# EAGLE board schematic (EAGLE 8.2.1)
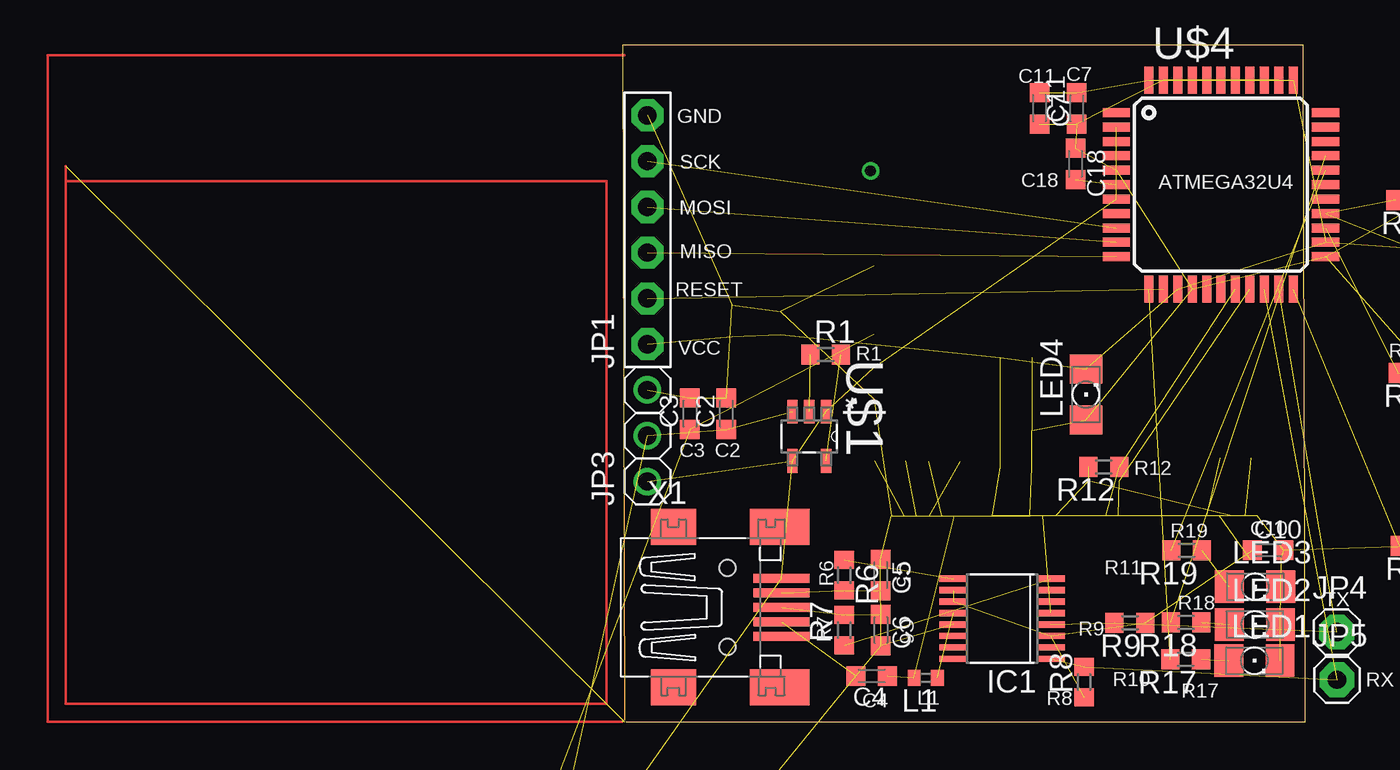
[diagram p0: board, top side]
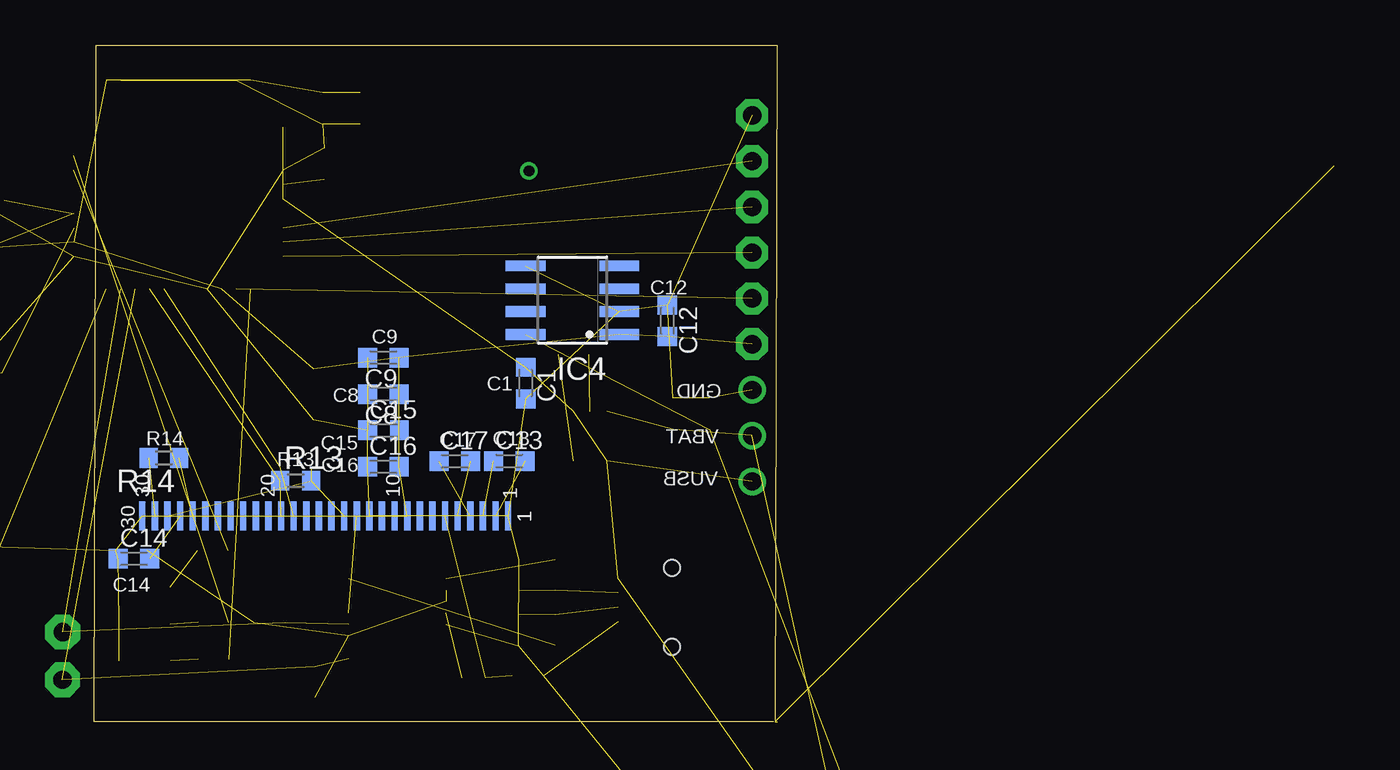
[diagram p1: board, bottom side, seen from below]

Size 37.87 x 37.56 mm. Coordinates in mm from the lower left corner, seen from the top.
Outline: 0.18,0 37.87,0 37.77,37.56 0,37.56 0.1,0.08
Copper layers (1*16): Top 0.0356mm / dielectric 1.5011mm / Bottom 0.0356mm
Design rules "oshpark-2layer": minimum track width 6mil, minimum drill 13mil, track to track 6mil, track to pad 6mil, pad to pad 6mil, via to via 6mil, smd to smd 6mil, copper to edge 15mil, drill to drill 6mil, minimum pad ring 7mil, minimum via ring 7mil, stop-mask expansion 2.5mil, vias tented up to drill 0mil, thermal gap 10mil

## Footprints (pad centres in the part's own frame; a part is rotated, then mirrored left to right if it is on the bottom)
C0603K = smd 1.05 x 1.08: 1 -0.875,0; 2 0.875,0
SOD323_ST = smd 0.8 x 0.6: A 1.25,0; C -1.25,0
SSOP16 = smd 0.35 x 1.55: 1 -2.223,-2.7; 2 -1.587,-2.7; 3 -0.953,-2.7; 4 -0.318,-2.7; 5 0.318,-2.7; 6 0.953,-2.7; 7 1.587,-2.7; 8 2.223,-2.7; 9 2.223,2.7; 10 1.587,2.7; 11 0.953,2.7; 12 0.318,2.7; 13 -0.318,2.7; 14 -0.953,2.7; 15 -1.587,2.7; 16 -2.223,2.7
SO08 = smd 0.6 x 2.2: 1 -1.905,-2.6; 2 -0.635,-2.6; 3 0.635,-2.6; 4 1.905,-2.6; 5 1.905,2.6; 6 0.635,2.6; 7 -0.635,2.6; 8 -1.905,2.6
1X06-BIG = drill 1.016 pad 1.778 octagon: 1 -6.35,0; 2 -3.81,0; 3 -1.27,0; 4 1.27,0; 5 3.81,0; 6 6.35,0
1X03 = drill 1.016: 1 -2.54,0; 2 0,0; 3 2.54,0
1X01 = drill 1.016 pad 1.93 octagon: 1 0,0
0402 = smd 0.7 x 0.9: 1 -0.65,0; 2 0.65,0
1206 = smd 1.6 x 1.803: A -1.422,0; C 1.422,0
R0603 = smd 1 x 1.1: 1 -0.85,0; 2 0.85,0
SOT95P270X145-5N = smd 1.321 x 0.559: 1 -1.372,0.94; 2 -1.372,0; 3 -1.372,-0.94; 4 1.372,-0.94; 5 1.372,0.94
SOT346-R = smd 0.7 x 0.9: 1 -0.95,-1.2; 2 0.95,-1.2; 3 0,1.2
1X30-0.7MM = smd 0.35 x 1.6: 1 -10.15,0; 2 -9.45,0; 3 -8.75,0; 4 -8.05,0; 5 -7.35,0; 6 -6.65,0; 7 -5.95,0; 8 -5.25,0; 9 -4.55,0; 10 -3.85,0; 11 -3.15,0; 12 -2.45,0; 13 -1.75,0; 14 -1.05,0; 15 -0.35,0; 16 0.35,0; 17 1.05,0; 18 1.75,0; 19 2.45,0; 20 3.15,0; 21 3.85,0; 22 4.55,0; 23 5.25,0; 24 5.95,0; 25 6.65,0; 26 7.35,0; 27 8.05,0; 28 8.75,0; 29 9.45,0; 30 10.15,0
TQFP44 = smd 1.5 x 0.5: 1 -5.8,4; 2 -5.8,3.2; 3 -5.8,2.4; 4 -5.8,1.6; 5 -5.8,0.8; 6 -5.8,0; 7 -5.8,-0.8; 8 -5.8,-1.6; 9 -5.8,-2.4; 10 -5.8,-3.2; 11 -5.8,-4; 23 5.8,-4; 24 5.8,-3.2; 25 5.8,-2.4; 26 5.8,-1.6; 27 5.8,-0.8; 28 5.8,0; 29 5.8,0.8; 30 5.8,1.6; 31 5.8,2.4; 32 5.8,3.2; 33 5.8,4 | smd 0.5 x 1.5: 12 -4,-5.8; 13 -3.2,-5.8; 14 -2.4,-5.8; 15 -1.6,-5.8; 16 -0.8,-5.8; 17 0,-5.8; 18 0.8,-5.8; 19 1.6,-5.8; 20 2.4,-5.8; 21 3.2,-5.8; 22 4,-5.8; 34 4,5.8; 35 3.2,5.8; 36 2.4,5.8; 37 1.6,5.8; 38 0.8,5.8; 39 0,5.8; 40 -0.8,5.8; 41 -1.6,5.8; 42 -2.4,5.8; 43 -3.2,5.8; 44 -4,5.8
PUSHBTN = smd 2.1 x 1.4: 1 -4.55,4.5; 2 4.55,4.5; 3 -4.55,-0.7; 4 4.55,-0.7
32005-301 = smd 3.1 x 0.5: 1 3,1.6; 2 3,0.8; 3 3,0; 4 3,-0.8; 5 3,-1.6 | smd 2.5 x 2: M1 -3,-4.45; M2 -3,4.45 | smd 3.3 x 2: M3 2.9,4.45; M4 2.9,-4.45 | hole 0.9: 0,2.2; 0,-2.2

## Placement (x,y rotation side)
C1  1uF  [C0603K]  13.93,18.8 270 bottom
C2  1uF  [C0603K]  5.75,17.09 90 top
C3  1uF  [C0603K]  3.73,17.09 90 top
C4  2.2uF  [C0603K]  13.82,2.54 180 top
C5  47pF  [C0603K]  14.31,8.13 270 top
C6  47pF  [C0603K]  14.33,5.08 270 top
C7  10nF  [C0603K]  23.13,34.05 270 top
C8  4.7uF  [C0603K]  21.83,18.19 180 bottom
C9  100nF  [C0603K]  21.83,20.21 180 bottom
C10  100nF  [C0603K]  35.81,9.51 0 top
C11  .1uf  [C0603K]  25.2,34.04 90 top
C12  1uF  [C0603K]  6.07,22.25 270 bottom
C13  1uF  [C0603K]  14.85,14.47 0 bottom
C14  2.2uF  [C0603K]  35.66,9.04 0 bottom
C15  2.2uF  [C0603K]  21.82,16.17 0 bottom
C16  .1uF  [C0603K]  21.83,14.15 0 bottom
C17  1uF  [C0603K]  17.87,14.45 0 bottom
C18  1uF  [C0603K]  25.12,30.96 270 top
C19  1uF  [C0603K]  -0.77,-39.87 0 top  (outside the outline)
D1  BAT60J  [SOD323_ST]  -4.93,-9.78 0 top  (outside the outline)
IC1  FT230XS  [SSOP16]  21.06,5.71 90 top
IC4  L4931D  [SO08]  11.34,23.39 90 bottom
JP1  [1X06-BIG]  1.37,27.3 90 top
JP3  [1X03]  1.37,15.88 90 top
JP4  [1X01]  39.62,4.98 0 top
JP5  [1X01]  39.64,2.32 0 top
L1  [0402]  16.81,2.44 180 top
LED1  [1206]  35.05,3.39 0 top
LED2  [1206]  35.08,5.4 0 top
LED3  [1206]  35.09,7.49 0 top
LED4  [1206]  25.7,18.16 90 top
R1  2K  [R0603]  11.26,20.37 0 top
R2  10K  [R0603]  43.87,19.35 180 top  (outside the outline)
R3  10K  [R0603]  43.95,9.75 180 top  (outside the outline)
R4  10K  [R0603]  43.73,28.94 180 top  (outside the outline)
R5  10K  [R0603]  -6.02,-21.78 0 top  (outside the outline)
R6  27  [R0603]  12.29,8.13 270 top
R7  27  [R0603]  12.29,5.08 90 top
R8  10K  [R0603]  25.6,2.21 90 top
R9  10K  [R0603]  28.14,5.49 180 top
R12  2K  [R0603]  26.7,14.15 180 top
R13  2K  [R0603]  26.7,13.37 0 bottom
R14  390K  [R0603]  34,14.63 180 bottom
R17  330  [R0603]  31.24,3.45 180 top
R18  330  [R0603]  31.25,5.51 180 top
R19  330  [R0603]  31.28,9.5 180 top
U$1  [SOT95P270X145-5N]  10.35,15.84 270 top
U$2  2JS305  [SOT346-R]  -5.36,-15.84 0 top  (outside the outline)
U$3  UG-2864HSWEG01  [1X30-0.7MM]  25.06,11.42 180 bottom
U$4  ATMEGA32U4-AU  [TQFP44]  33.2,29.81 0 top
U$10  PUSHBTN  [PUSHBTN]  60.1,30 90 top  (outside the outline)
U$12  PUSHBTN  [PUSHBTN]  60.1,15 0 top  (outside the outline)
U$13  PUSHBTN  [PUSHBTN]  60.1,15 90 top  (outside the outline)
X1  MINI-USB-32005-301  [32005-301]  5.82,6.35 0 top

## Library data of the parts
C1-C19 = rcl
D1 = diode
IC1 = ft230x_10; MF: FTDI; MPN: FT230XS; OC_FARNELL: 2081321; OC_NEWARK: 83T7087
IC4 = v-reg-3
JP1 JP3-JP5 LED1-LED4 U$3 U$4 = adafruit
L1 = inductors
R1-R5 R7-R9 R12-R14 R17-R19 = eagle-ltspice; SPICEMODEL: NONE; SPICEPREFIX: R
R6 = eagle-ltspice; SPICEMODEL: NONE; SPICEPREFIX: R6
U$1 = Microchip_By_element14_Batch_1; IC_VALUE: MCP73812; MPN: MCP73812T-420I/OT; OC_FARNELL: 1627187; OC_NEWARK: 27M0232; PACKAGE: SOT-5; SUPPLIER: Microchip
U$2 = SOT346-R
U$10 U$12 U$13 = Supply
X1 = con-cypressindustries; OC_FARNELL: unknown; OC_NEWARK: unknown

## Nets
8: IC1.8 R7.1
9: IC1.9 R6.1
B0: R2.2 U$4.25 U$12.3 U$12.4
B1: R3.2 U$4.22 U$10.3 U$10.4
B2: R4.2 U$4.26 U$13.3 U$13.4
FTDI_VCC: IC1.12 L1.1
GND: C1.2 C2.2 C3.2 C4.2 C5.1 C6.2 C7.2 C8.2 C9.2 C10.2 C11.1 C12.1 C14.1 C15.1 C16.1 C18.1 C19.2 IC1.5 IC1.13 IC4.2 IC4.5 JP1.6 JP3.3 LED1.C LED2.C LED3.C LED4.A R2.1 R3.1 R4.1 R5.1 R14.2 U$3.1 U$3.8 U$3.10 U$3.12 U$3.13 U$3.15 U$3.16 U$3.17 U$3.29 U$3.30 U$4.5 U$4.15 U$4.23 U$4.35 U$4.43 X1.4
MISO: JP1.3 U$4.11
MOSI: JP1.4 U$4.10
N$1: R1.2 U$1.5
N$2: R1.1 U$1.2
N$5: C14.2 U$3.27
N$6: C17.2 U$3.5
N$7: C13.2 U$3.2
N$8: C17.1 U$3.4
N$9: R14.1 U$3.26
N$10: C13.1 U$3.3
N$14: C18.2 U$4.6
N$17: LED1.A R17.1
N$18: LED2.A R18.1
N$19: LED3.A R19.1
N$21: R19.2 U$4.29
N$22: R18.2 U$4.30
N$23: R17.2 U$4.12
NET1: C10.1 IC1.3 IC1.10 IC1.11 R8.1 R9.1
OLED_SCL: R12.1 U$3.18 U$4.18
OLED_SDA: R13.1 U$3.19 U$3.20 U$4.19
RESET: JP1.2 U$4.13
RXD: IC1.1 JP5.1 R8.2 U$4.20
SCK: JP1.5 U$4.9
SHEILD: X1.5
TXD: IC1.4 JP4.1 R9.2 U$4.21
USB+: C6.1 R7.2 X1.3
USB-: C5.2 R6.2 X1.2
VBAT: C2.1 JP3.2 U$1.3 U$2.3
VCC: C4.1 C7.1 C8.1 C9.1 C11.2 C12.2 C15.2 C16.2 IC4.1 JP1.1 L1.2 LED4.C R12.2 R13.2 U$3.6 U$3.9 U$3.11 U$3.14 U$3.28 U$4.14 U$4.24 U$4.34 U$4.44 U$10.1 U$10.2 U$12.1 U$12.2 U$13.1 U$13.2
VDD: C3.1 C19.1 D1.C IC4.8 R5.2 U$2.1
VUSB: C1.1 D1.A JP3.1 U$1.1 U$1.4 U$2.2 U$4.2 U$4.7 X1.1

## Tracks (layer width: path | path; a pad name or v marks a point on that pad's centre or on a via)
8  (1 unrouted)
9  (1 unrouted)
B0  (3 unrouted)
B1  (3 unrouted)
B2  (3 unrouted)
FTDI_VCC  (1 unrouted)
GND  (47 unrouted)
MISO  (1 unrouted)
MOSI  (1 unrouted)
N$1  (1 unrouted)
N$2  (1 unrouted)
N$3  (via drill 0.6)
  other vias: 13.75,30.57
N$4  (2 unrouted)
  Top 0.152: 0.1,37 -31.9,37 -31.9,0 -0.05,0 | -30.9,30 -30.9,1 -0.9,1 -0.9,30 -30.9,30 | -30.9,30 -30.9,30.85
N$5  (1 unrouted)
N$6  (1 unrouted)
N$7  (1 unrouted)
N$8  (1 unrouted)
N$9  (1 unrouted)
N$10  (1 unrouted)
N$14  (1 unrouted)
N$17  (1 unrouted)
N$18  (1 unrouted)
N$19  (1 unrouted)
N$21  (1 unrouted)
N$22  (1 unrouted)
N$23  (1 unrouted)
NET1  (5 unrouted)
OLED_SCL  (2 unrouted)
OLED_SDA  (3 unrouted)
RESET  (1 unrouted)
RXD  (3 unrouted)
SCK  (1 unrouted)
TXD  (3 unrouted)
USB+  (2 unrouted)
USB-  (2 unrouted)
VBAT  (3 unrouted)
VCC  (28 unrouted)
VDD  (5 unrouted)
VUSB  (8 unrouted)

## Text on the board
tSilk: C11 | C7 | GND | SCK | C18 | ATMEGA32U4 | R4 | MOSI | MISO | RESET | VCC | R1 | R2 | C3 | C2 | R12 | R19 | C10 | R3 | R6 | C5 | R11 | R7 | C6 | R18 | TX | R9 | R10 | RX | C4 | L1 | R8 | R17
bSilk: C12 | C9 | C1 | GND | C8 | VBAT | C13 | C17 | C16 | C15 | R14 | R13 | VUSB | 1 | 30 | C14